# EAGLE board 14275-SparkFun_Ublox SAM-M8Q-Panel (EAGLE 9.1.0), part 1 of 3
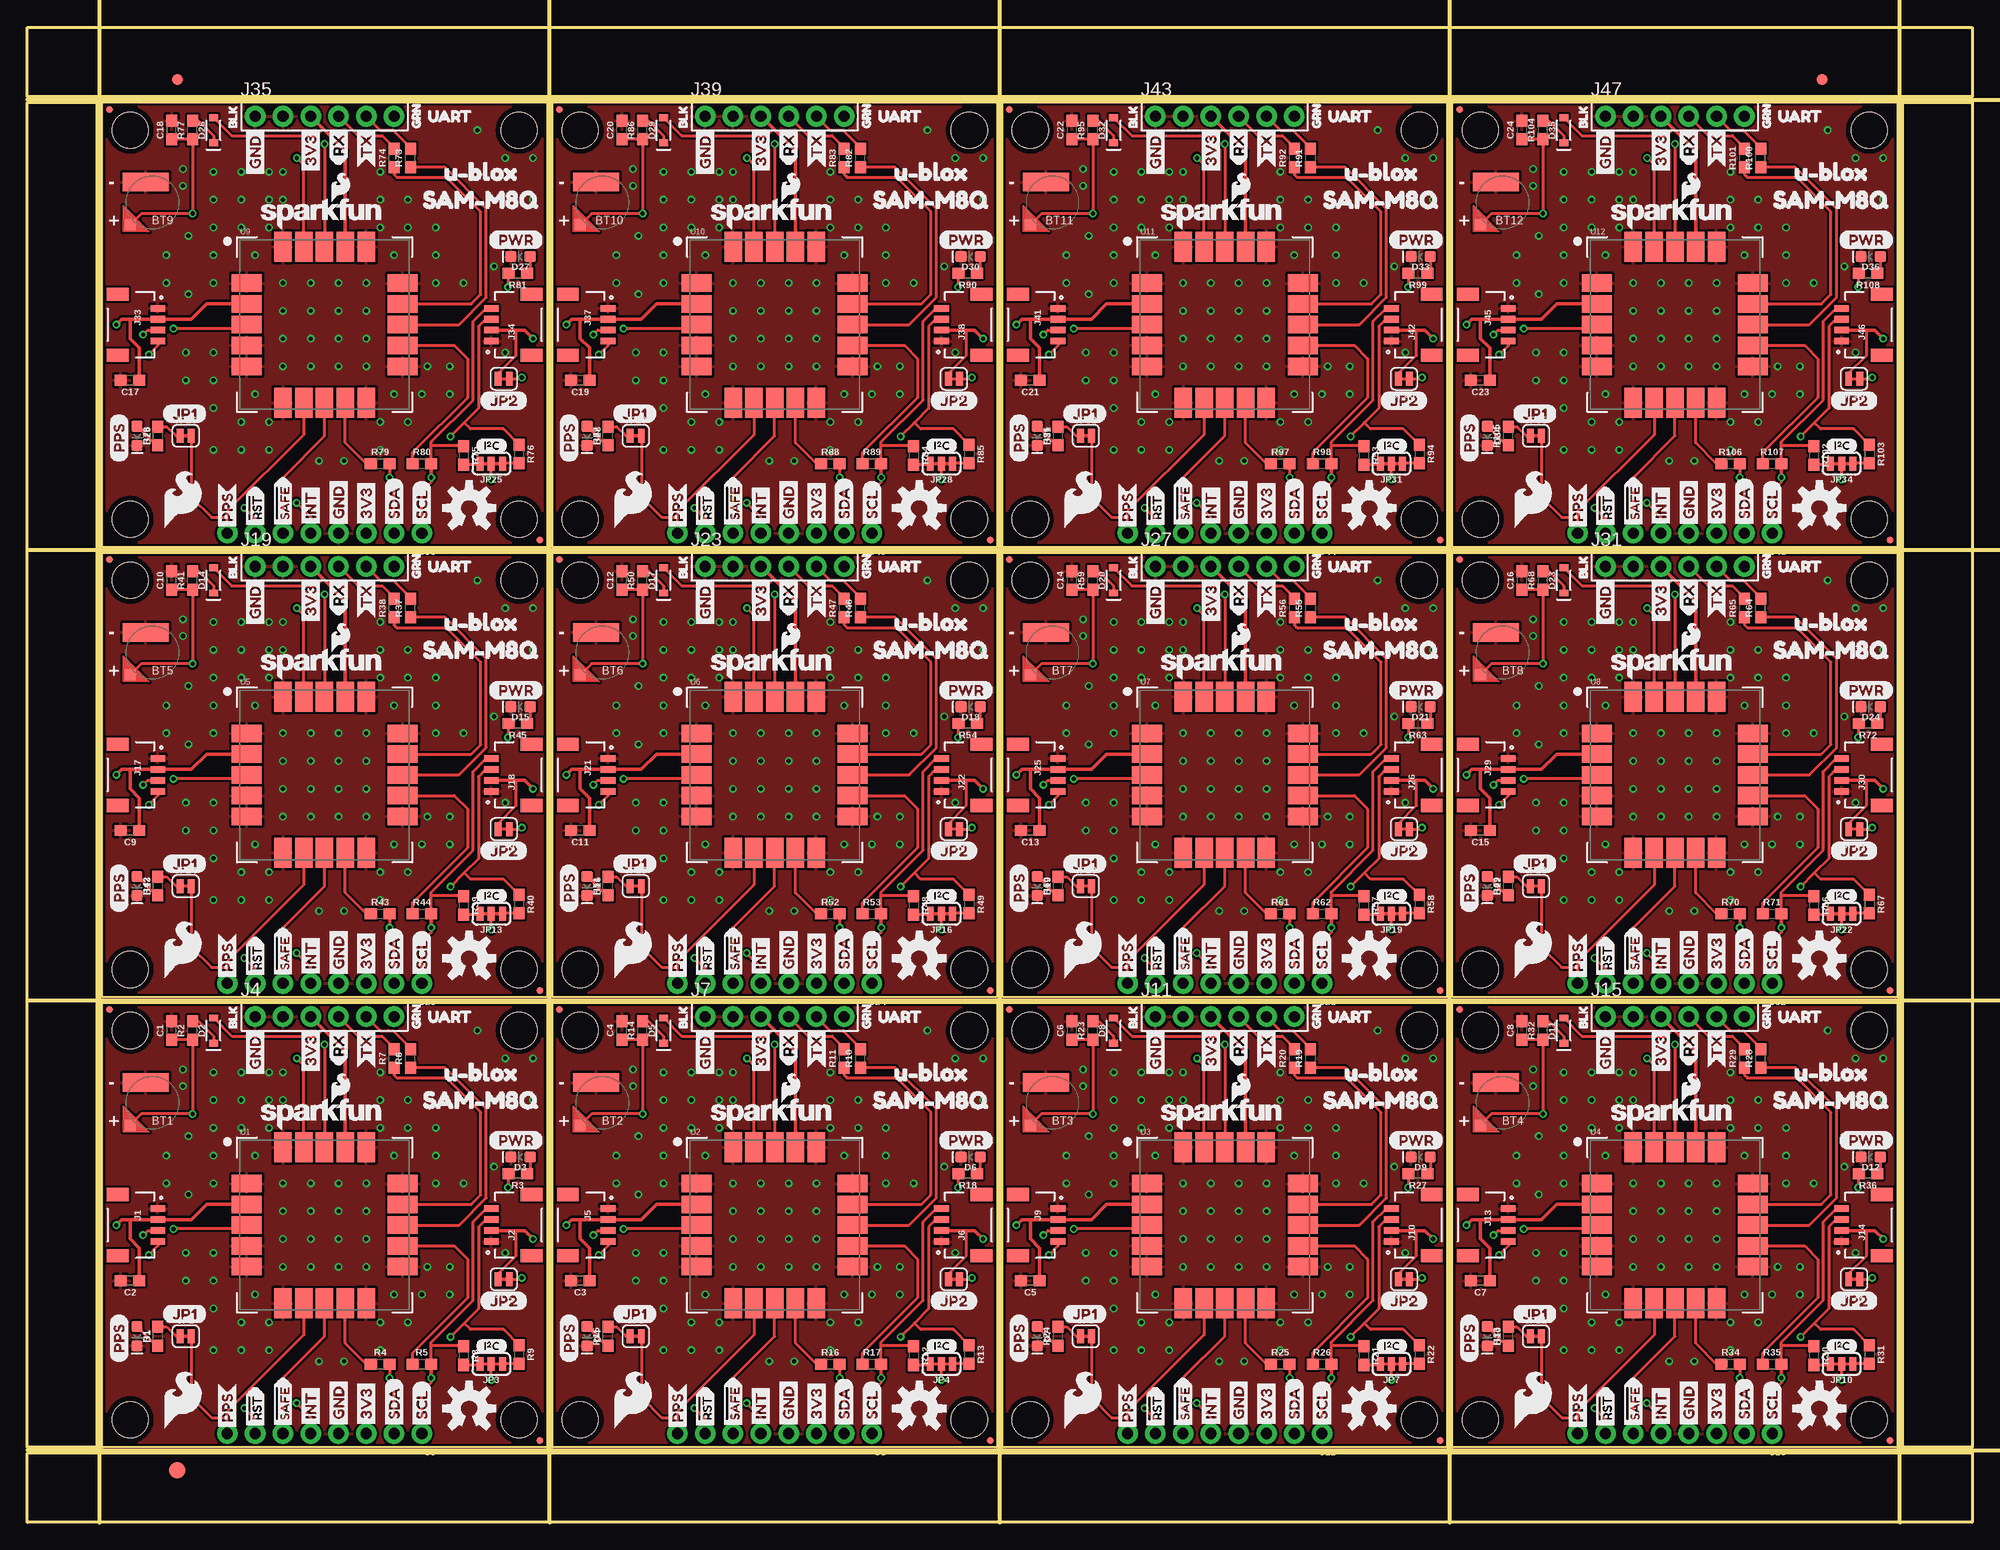
[diagram p0: board, top side]
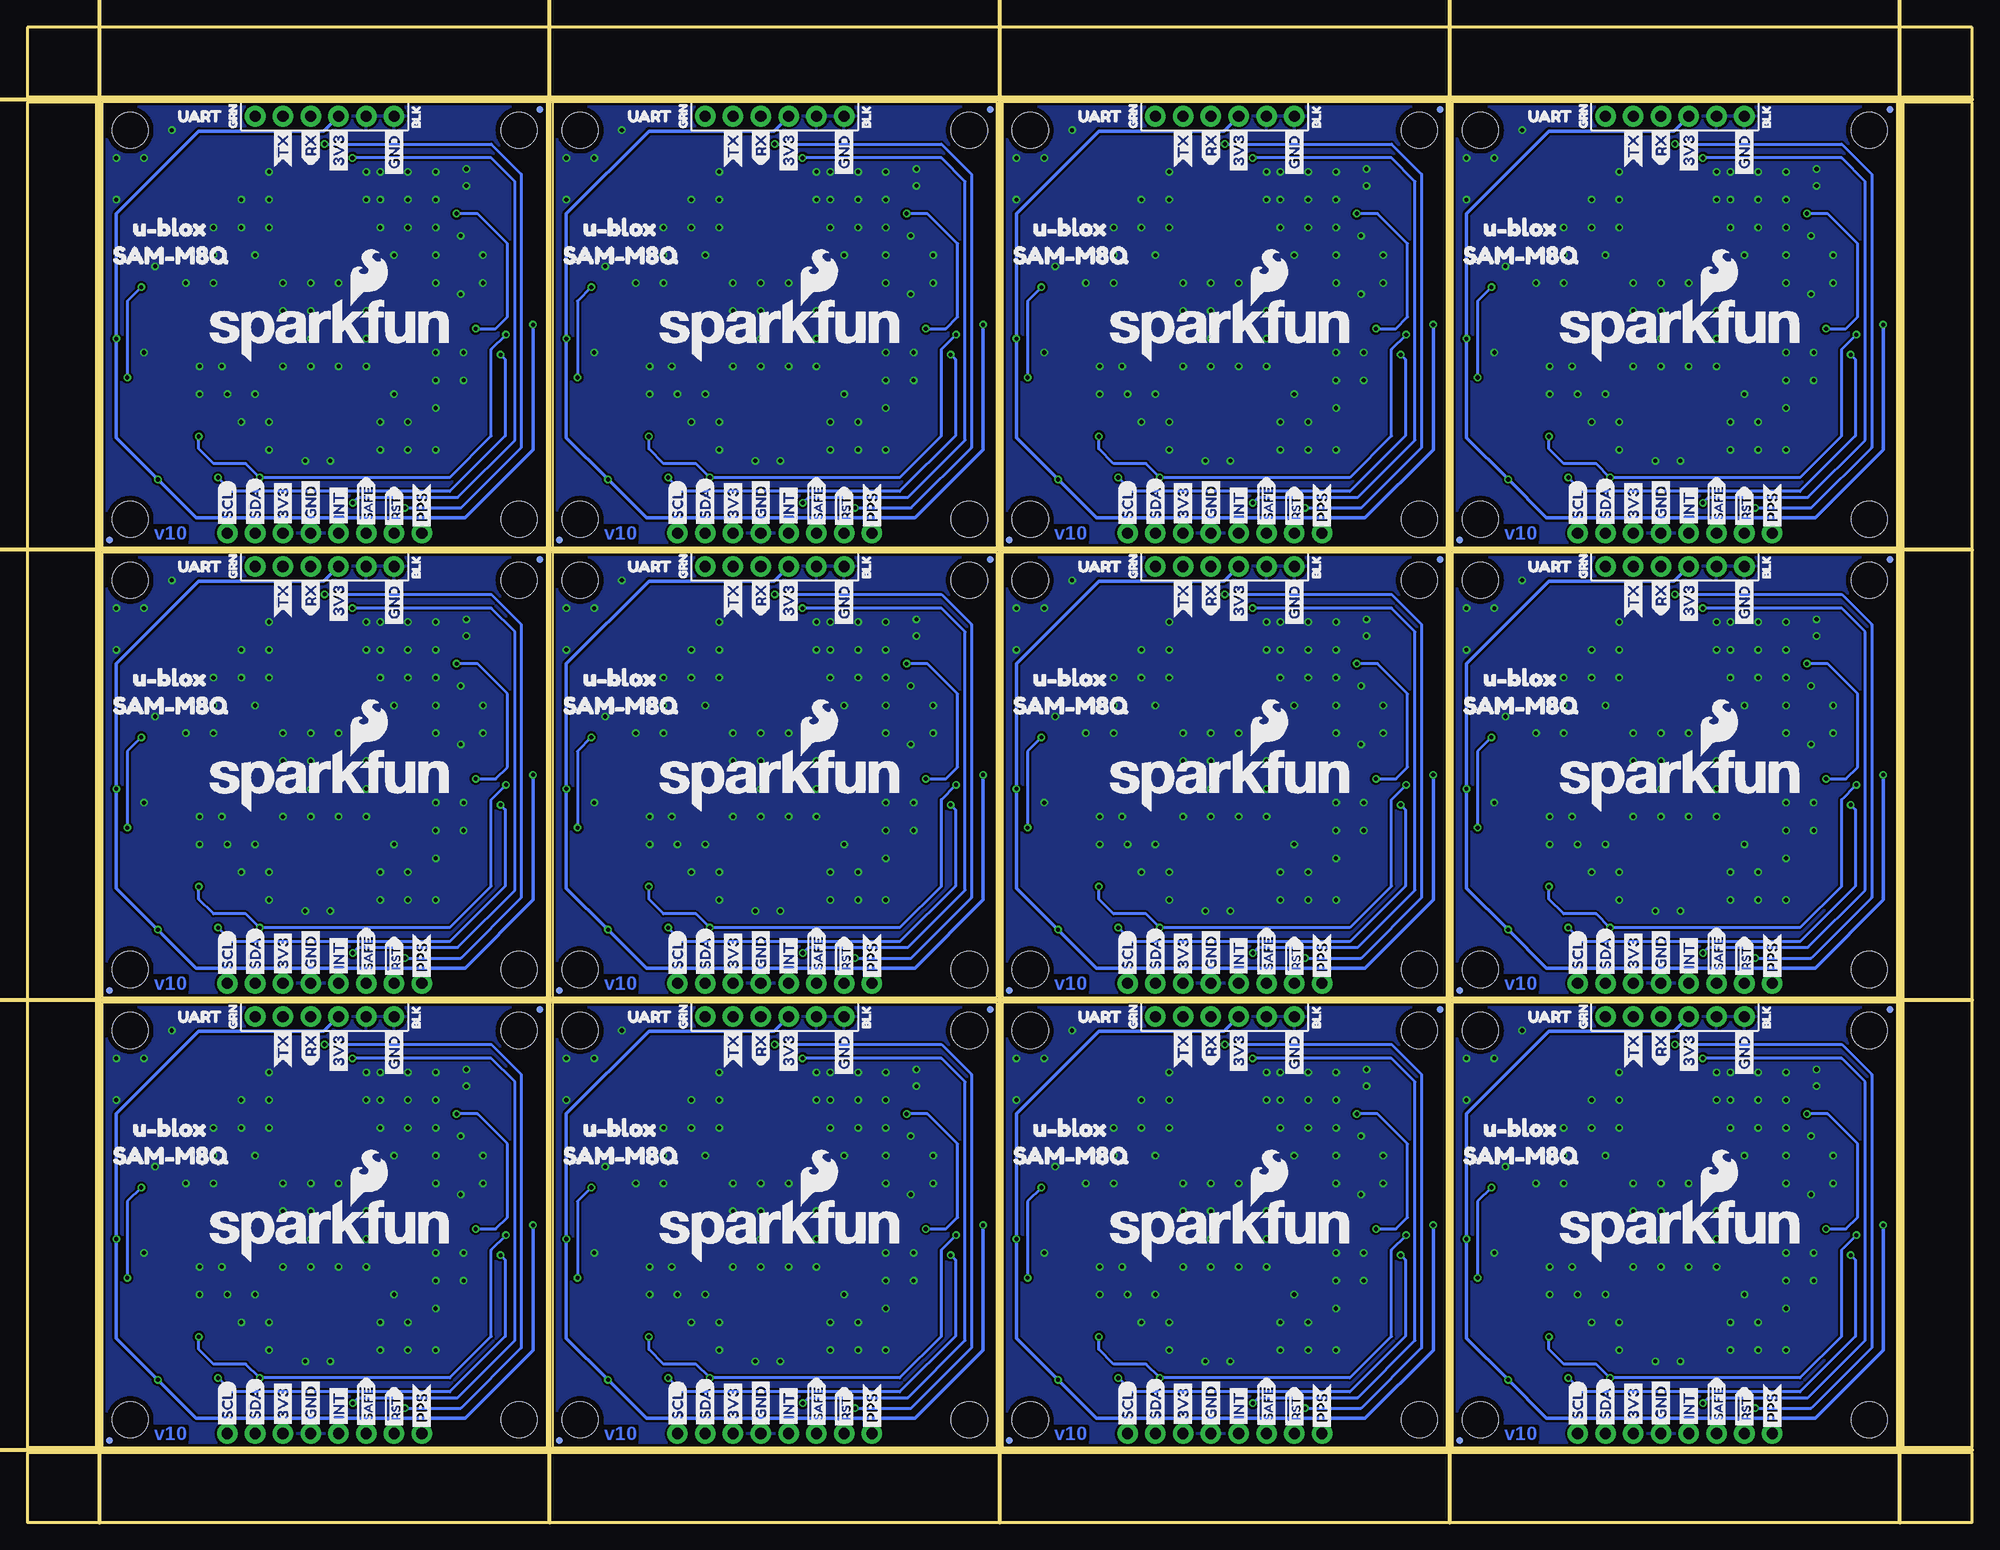
[diagram p1: board, bottom side, seen from below]

Size 177.8 x 136.65 mm. Coordinates in mm from the lower left corner, seen from the top.
Outline: 6.86,6.86 6.86,47.5 47.5,47.5 47.5,6.86 6.86,6.86
Outline: 48.01,6.86 48.01,47.5 88.65,47.5 88.65,6.86 48.01,6.86
Outline: 89.15,6.86 89.15,47.5 129.79,47.5 129.79,6.86 89.15,6.86
Outline: 130.3,6.86 130.3,47.5 170.94,47.5 170.94,6.86 130.3,6.86
Outline: 6.86,48.01 6.86,88.65 47.5,88.65 47.5,48.01 6.86,48.01
Outline: 48.01,48.01 48.01,88.65 88.65,88.65 88.65,48.01 48.01,48.01
Outline: 89.15,48.01 89.15,88.65 129.79,88.65 129.79,48.01 89.15,48.01
Outline: 130.3,48.01 130.3,88.65 170.94,88.65 170.94,48.01 130.3,48.01
Outline: 6.86,89.15 6.86,129.79 47.5,129.79 47.5,89.15 6.86,89.15
Outline: 48.01,89.15 48.01,129.79 88.65,129.79 88.65,89.15 48.01,89.15
Outline: 89.15,89.15 89.15,129.79 129.79,129.79 129.79,89.15 89.15,89.15
Outline: 130.3,89.15 130.3,129.79 170.94,129.79 170.94,89.15 130.3,89.15
Outline: 0,6.35 177.8,6.35 177.8,0 0,0 0,6.35
Outline: 171.45,129.79 177.8,129.79 177.8,6.86 171.45,6.86 171.45,129.79
Outline: 0,136.65 177.8,136.65 177.8,130.3 0,130.3 0,136.65
Outline: 0,129.79 6.35,129.79 6.35,6.86 0,6.86 0,129.79
Copper layers (1*16): Top 0.035mm / dielectric 1.5mm / Bottom 0.035mm
Design rules "SparkFun-2-layer-PCBWay-LIMIT": minimum track width 6mil, minimum drill 0.3mm, track to track 6mil, track to pad 6mil, pad to pad 6mil, via to via 6mil, smd to smd 6mil, copper to edge 6mil, drill to drill 6mil, minimum pad ring 6mil, minimum via ring 6mil, stop-mask expansion 4mil, vias tented up to drill 25mil, thermal gap 10mil
Net classes: 0 default: width 0.254 mm
Milling: 9 lines

## Footprints (pad centres in the part's own frame; a part is rotated, then mirrored left to right if it is on the bottom)
ML414H_IV01E = smd 1 x 1: + 2.022,2.032 | smd 4.2 x 1.7: - 0.6,-1.85
0603 = smd 1.1 x 1: 1 -0.85,0; 2 0.85,0
LED-0603 = smd 1 x 1: A -0.877,0; C 0.877,0
SOD-323 = smd 0.63 x 0.83: A 1.15,0; C -1.15,0
FIDUCIAL-1X2 = smd 1 x 1: 1 0,0
FIDUCIAL-1.5X3 = smd 1.5 x 1.5: 1 0,0
FIDUCIAL-MICRO = smd 0.635 x 0.635: 1 0,0
STAND-OFF = hole 3.302: 0,0
JST04_1MM_RA = smd 0.6 x 1.35: 1 -1.5,0; 2 -0.5,0; 3 0.5,0; 4 1.5,0 | smd 1.2 x 2: NC1 2.8,-3.675; NC2 -2.8,-3.675
1X08_NO_SILK = drill 1.016 pad 1.88: 1 0,0; 2 2.54,0; 3 5.08,0; 4 7.62,0; 5 10.16,0; 6 12.7,0; 7 15.24,0; 8 17.78,0
1X06_NO_SILK = drill 1.016 pad 1.88: 1 0,0; 2 2.54,0; 3 5.08,0; 4 7.62,0; 5 10.16,0; 6 12.7,0
SMT-JUMPER_2_NC_TRACE_SILK = smd 0.635 x 1.27: 1 -0.508,0; 2 0.508,0
SMT-JUMPER_3_2-NC_TRACE_SILK = smd 0.635 x 1.27: 1 -1.016,0; 2 0,0; 3 1.016,0
SAM-M8Q = smd 2.75 x 1.6: 1 -7.125,3.8; 2 -7.125,1.9; 3 -7.125,0; 4 -7.125,-1.9; 5 -7.125,-3.8; 11 7.125,-3.8; 12 7.125,-1.9; 13 7.125,0; 14 7.125,1.9; 15 7.125,3.8 | smd 1.6 x 2.75: 6 -3.8,-7.125; 7 -1.9,-7.125; 8 0,-7.125; 9 1.9,-7.125; 10 3.8,-7.125; 16 3.8,7.125; 17 1.9,7.125; 18 0,7.125; 19 -1.9,7.125; 20 -3.8,7.125

## Placement (x,y rotation side)
BT1  6.8MM_COIN_CELL  [ML414H_IV01E]  11.43,38.35 180 top
BT2  6.8MM_COIN_CELL  [ML414H_IV01E]  52.58,38.35 180 top
BT3  6.8MM_COIN_CELL  [ML414H_IV01E]  93.73,38.35 180 top
BT4  6.8MM_COIN_CELL  [ML414H_IV01E]  134.87,38.35 180 top
BT5  6.8MM_COIN_CELL  [ML414H_IV01E]  11.43,79.5 180 top
BT6  6.8MM_COIN_CELL  [ML414H_IV01E]  52.58,79.5 180 top
BT7  6.8MM_COIN_CELL  [ML414H_IV01E]  93.73,79.5 180 top
BT8  6.8MM_COIN_CELL  [ML414H_IV01E]  134.87,79.5 180 top
BT9  6.8MM_COIN_CELL  [ML414H_IV01E]  11.43,120.65 180 top
BT10  6.8MM_COIN_CELL  [ML414H_IV01E]  52.58,120.65 180 top
BT11  6.8MM_COIN_CELL  [ML414H_IV01E]  93.73,120.65 180 top
BT12  6.8MM_COIN_CELL  [ML414H_IV01E]  134.87,120.65 180 top
C1  1.0uF  [0603]  13.21,44.96 90 top
C2  1.0uF  [0603]  9.4,22.1 180 top
C3  1.0uF  [0603]  50.55,22.1 180 top
C4  1.0uF  [0603]  54.36,44.96 90 top
C5  1.0uF  [0603]  91.69,22.1 180 top
C6  1.0uF  [0603]  95.5,44.96 90 top
C7  1.0uF  [0603]  132.84,22.1 180 top
C8  1.0uF  [0603]  136.65,44.96 90 top
C9  1.0uF  [0603]  9.4,63.25 180 top
C10  1.0uF  [0603]  13.21,86.11 90 top
C11  1.0uF  [0603]  50.55,63.25 180 top
C12  1.0uF  [0603]  54.36,86.11 90 top
C13  1.0uF  [0603]  91.69,63.25 180 top
C14  1.0uF  [0603]  95.5,86.11 90 top
C15  1.0uF  [0603]  132.84,63.25 180 top
C16  1.0uF  [0603]  136.65,86.11 90 top
C17  1.0uF  [0603]  9.4,104.39 180 top
C18  1.0uF  [0603]  13.21,127.25 90 top
C19  1.0uF  [0603]  50.55,104.39 180 top
C20  1.0uF  [0603]  54.36,127.25 90 top
C21  1.0uF  [0603]  91.69,104.39 180 top
C22  1.0uF  [0603]  95.5,127.25 90 top
C23  1.0uF  [0603]  132.84,104.39 180 top
C24  1.0uF  [0603]  136.65,127.25 90 top
D1  Yellow  [LED-0603]  10.03,17.02 270 top
D2  0.5A/40V/420mV  [SOD-323]  17.02,44.96 90 top
D3  RED  [LED-0603]  45.08,33.4 180 top
D4  Yellow  [LED-0603]  51.18,17.02 270 top
D5  0.5A/40V/420mV  [SOD-323]  58.17,44.96 90 top
D6  RED  [LED-0603]  86.23,33.4 180 top
D7  Yellow  [LED-0603]  92.33,17.02 270 top
D8  0.5A/40V/420mV  [SOD-323]  99.31,44.96 90 top
D9  RED  [LED-0603]  127.38,33.4 180 top
D10  Yellow  [LED-0603]  133.48,17.02 270 top
D11  0.5A/40V/420mV  [SOD-323]  140.46,44.96 90 top
D12  RED  [LED-0603]  168.53,33.4 180 top
D13  Yellow  [LED-0603]  10.03,58.17 270 top
D14  0.5A/40V/420mV  [SOD-323]  17.02,86.11 90 top
D15  RED  [LED-0603]  45.08,74.55 180 top
D16  Yellow  [LED-0603]  51.18,58.17 270 top
D17  0.5A/40V/420mV  [SOD-323]  58.17,86.11 90 top
D18  RED  [LED-0603]  86.23,74.55 180 top
D19  Yellow  [LED-0603]  92.33,58.17 270 top
D20  0.5A/40V/420mV  [SOD-323]  99.31,86.11 90 top
D21  RED  [LED-0603]  127.38,74.55 180 top
D22  Yellow  [LED-0603]  133.48,58.17 270 top
D23  0.5A/40V/420mV  [SOD-323]  140.46,86.11 90 top
D24  RED  [LED-0603]  168.53,74.55 180 top
D25  Yellow  [LED-0603]  10.03,99.31 270 top
D26  0.5A/40V/420mV  [SOD-323]  17.02,127.25 90 top
D27  RED  [LED-0603]  45.08,115.7 180 top
D28  Yellow  [LED-0603]  51.18,99.31 270 top
D29  0.5A/40V/420mV  [SOD-323]  58.17,127.25 90 top
D30  RED  [LED-0603]  86.23,115.7 180 top
D31  Yellow  [LED-0603]  92.33,99.31 270 top
D32  0.5A/40V/420mV  [SOD-323]  99.31,127.25 90 top
D33  RED  [LED-0603]  127.38,115.7 180 top
D34  Yellow  [LED-0603]  133.48,99.31 270 top
D35  0.5A/40V/420mV  [SOD-323]  140.46,127.25 90 top
D36  RED  [LED-0603]  168.53,115.7 180 top
E$1  [FIDUCIAL-1X2]  13.72,131.89 0 top
E$2  [FIDUCIAL-1X2]  164.08,131.89 0 top
E$3  [FIDUCIAL-1.5X3]  13.72,4.76 0 top
FD1  FIDUCIALUFIDUCIAL  [FIDUCIAL-MICRO]  46.86,7.49 0 top
FD2  FIDUCIALUFIDUCIAL  [FIDUCIAL-MICRO]  46.86,7.49 0 bottom
FD3  FIDUCIALUFIDUCIAL  [FIDUCIAL-MICRO]  7.49,46.86 0 top
FD4  FIDUCIALUFIDUCIAL  [FIDUCIAL-MICRO]  7.49,46.86 0 bottom
FD5  FIDUCIALUFIDUCIAL  [FIDUCIAL-MICRO]  88.01,7.49 0 top
FD6  FIDUCIALUFIDUCIAL  [FIDUCIAL-MICRO]  48.64,46.86 0 top
FD7  FIDUCIALUFIDUCIAL  [FIDUCIAL-MICRO]  88.01,7.49 0 bottom
FD8  FIDUCIALUFIDUCIAL  [FIDUCIAL-MICRO]  48.64,46.86 0 bottom
FD9  FIDUCIALUFIDUCIAL  [FIDUCIAL-MICRO]  129.16,7.49 0 top
FD10  FIDUCIALUFIDUCIAL  [FIDUCIAL-MICRO]  89.79,46.86 0 top
FD11  FIDUCIALUFIDUCIAL  [FIDUCIAL-MICRO]  129.16,7.49 0 bottom
FD12  FIDUCIALUFIDUCIAL  [FIDUCIAL-MICRO]  89.79,46.86 0 bottom
FD13  FIDUCIALUFIDUCIAL  [FIDUCIAL-MICRO]  170.31,7.49 0 top
FD14  FIDUCIALUFIDUCIAL  [FIDUCIAL-MICRO]  130.94,46.86 0 top
FD15  FIDUCIALUFIDUCIAL  [FIDUCIAL-MICRO]  170.31,7.49 0 bottom
FD16  FIDUCIALUFIDUCIAL  [FIDUCIAL-MICRO]  130.94,46.86 0 bottom
FD17  FIDUCIALUFIDUCIAL  [FIDUCIAL-MICRO]  46.86,48.64 0 top
FD18  FIDUCIALUFIDUCIAL  [FIDUCIAL-MICRO]  7.49,88.01 0 top
FD19  FIDUCIALUFIDUCIAL  [FIDUCIAL-MICRO]  46.86,48.64 0 bottom
FD20  FIDUCIALUFIDUCIAL  [FIDUCIAL-MICRO]  7.49,88.01 0 bottom
FD21  FIDUCIALUFIDUCIAL  [FIDUCIAL-MICRO]  88.01,48.64 0 top
FD22  FIDUCIALUFIDUCIAL  [FIDUCIAL-MICRO]  48.64,88.01 0 top
FD23  FIDUCIALUFIDUCIAL  [FIDUCIAL-MICRO]  88.01,48.64 0 bottom
FD24  FIDUCIALUFIDUCIAL  [FIDUCIAL-MICRO]  48.64,88.01 0 bottom
FD25  FIDUCIALUFIDUCIAL  [FIDUCIAL-MICRO]  129.16,48.64 0 top
FD26  FIDUCIALUFIDUCIAL  [FIDUCIAL-MICRO]  89.79,88.01 0 top
FD27  FIDUCIALUFIDUCIAL  [FIDUCIAL-MICRO]  129.16,48.64 0 bottom
FD28  FIDUCIALUFIDUCIAL  [FIDUCIAL-MICRO]  89.79,88.01 0 bottom
FD29  FIDUCIALUFIDUCIAL  [FIDUCIAL-MICRO]  170.31,48.64 0 top
FD30  FIDUCIALUFIDUCIAL  [FIDUCIAL-MICRO]  130.94,88.01 0 top
FD31  FIDUCIALUFIDUCIAL  [FIDUCIAL-MICRO]  170.31,48.64 0 bottom
FD32  FIDUCIALUFIDUCIAL  [FIDUCIAL-MICRO]  130.94,88.01 0 bottom
FD33  FIDUCIALUFIDUCIAL  [FIDUCIAL-MICRO]  46.86,89.79 0 top
FD34  FIDUCIALUFIDUCIAL  [FIDUCIAL-MICRO]  7.49,129.16 0 top
FD35  FIDUCIALUFIDUCIAL  [FIDUCIAL-MICRO]  46.86,89.79 0 bottom
FD36  FIDUCIALUFIDUCIAL  [FIDUCIAL-MICRO]  7.49,129.16 0 bottom
FD37  FIDUCIALUFIDUCIAL  [FIDUCIAL-MICRO]  88.01,89.79 0 top
FD38  FIDUCIALUFIDUCIAL  [FIDUCIAL-MICRO]  48.64,129.16 0 top
FD39  FIDUCIALUFIDUCIAL  [FIDUCIAL-MICRO]  88.01,89.79 0 bottom
FD40  FIDUCIALUFIDUCIAL  [FIDUCIAL-MICRO]  48.64,129.16 0 bottom
FD41  FIDUCIALUFIDUCIAL  [FIDUCIAL-MICRO]  129.16,89.79 0 top
FD42  FIDUCIALUFIDUCIAL  [FIDUCIAL-MICRO]  89.79,129.16 0 top
FD43  FIDUCIALUFIDUCIAL  [FIDUCIAL-MICRO]  129.16,89.79 0 bottom
FD44  FIDUCIALUFIDUCIAL  [FIDUCIAL-MICRO]  89.79,129.16 0 bottom
FD45  FIDUCIALUFIDUCIAL  [FIDUCIAL-MICRO]  170.31,89.79 0 top
FD46  FIDUCIALUFIDUCIAL  [FIDUCIAL-MICRO]  130.94,129.16 0 top
FD47  FIDUCIALUFIDUCIAL  [FIDUCIAL-MICRO]  170.31,89.79 0 bottom
FD48  FIDUCIALUFIDUCIAL  [FIDUCIAL-MICRO]  130.94,129.16 0 bottom
H1  STAND-OFF  [STAND-OFF]  9.4,9.4 0 top
H2  STAND-OFF  [STAND-OFF]  44.96,9.4 0 top
H3  STAND-OFF  [STAND-OFF]  9.4,44.96 0 top
H4  STAND-OFF  [STAND-OFF]  44.96,44.96 0 top
H5  STAND-OFF  [STAND-OFF]  50.55,44.96 0 top
H6  STAND-OFF  [STAND-OFF]  86.11,44.96 0 top
H7  STAND-OFF  [STAND-OFF]  50.55,9.4 0 top
H8  STAND-OFF  [STAND-OFF]  86.11,9.4 0 top
H9  STAND-OFF  [STAND-OFF]  91.69,44.96 0 top
H10  STAND-OFF  [STAND-OFF]  127.25,44.96 0 top
H11  STAND-OFF  [STAND-OFF]  91.69,9.4 0 top
H12  STAND-OFF  [STAND-OFF]  127.25,9.4 0 top
H13  STAND-OFF  [STAND-OFF]  132.84,44.96 0 top
H14  STAND-OFF  [STAND-OFF]  168.4,44.96 0 top
H15  STAND-OFF  [STAND-OFF]  132.84,9.4 0 top
H16  STAND-OFF  [STAND-OFF]  168.4,9.4 0 top
H17  STAND-OFF  [STAND-OFF]  9.4,86.11 0 top
H18  STAND-OFF  [STAND-OFF]  44.96,86.11 0 top
H19  STAND-OFF  [STAND-OFF]  9.4,50.55 0 top
H20  STAND-OFF  [STAND-OFF]  44.96,50.55 0 top
H21  STAND-OFF  [STAND-OFF]  50.55,86.11 0 top
H22  STAND-OFF  [STAND-OFF]  86.11,86.11 0 top
H23  STAND-OFF  [STAND-OFF]  50.55,50.55 0 top
H24  STAND-OFF  [STAND-OFF]  86.11,50.55 0 top
H25  STAND-OFF  [STAND-OFF]  91.69,86.11 0 top
H26  STAND-OFF  [STAND-OFF]  127.25,86.11 0 top
H27  STAND-OFF  [STAND-OFF]  91.69,50.55 0 top
H28  STAND-OFF  [STAND-OFF]  127.25,50.55 0 top
H29  STAND-OFF  [STAND-OFF]  132.84,86.11 0 top
H30  STAND-OFF  [STAND-OFF]  168.4,86.11 0 top
H31  STAND-OFF  [STAND-OFF]  132.84,50.55 0 top
H32  STAND-OFF  [STAND-OFF]  168.4,50.55 0 top
H33  STAND-OFF  [STAND-OFF]  9.4,127.25 0 top
H34  STAND-OFF  [STAND-OFF]  44.96,127.25 0 top
H35  STAND-OFF  [STAND-OFF]  9.4,91.69 0 top
H36  STAND-OFF  [STAND-OFF]  44.96,91.69 0 top
H37  STAND-OFF  [STAND-OFF]  50.55,127.25 0 top
H38  STAND-OFF  [STAND-OFF]  86.11,127.25 0 top
H39  STAND-OFF  [STAND-OFF]  50.55,91.69 0 top
H40  STAND-OFF  [STAND-OFF]  86.11,91.69 0 top
H41  STAND-OFF  [STAND-OFF]  91.69,127.25 0 top
H42  STAND-OFF  [STAND-OFF]  127.25,127.25 0 top
H43  STAND-OFF  [STAND-OFF]  91.69,91.69 0 top
H44  STAND-OFF  [STAND-OFF]  127.25,91.69 0 top
H45  STAND-OFF  [STAND-OFF]  132.84,127.25 0 top
H46  STAND-OFF  [STAND-OFF]  168.4,127.25 0 top
H47  STAND-OFF  [STAND-OFF]  132.84,91.69 0 top
H48  STAND-OFF  [STAND-OFF]  168.4,91.69 0 top
J1  Qwiic Right Angle  [JST04_1MM_RA]  11.94,27.18 270 top
J2  Qwiic Right Angle  [JST04_1MM_RA]  42.42,27.18 90 top
J3  [1X08_NO_SILK]  36.07,8.13 180 top
J4  BOOT  [1X06_NO_SILK]  20.83,46.23 0 top
J5  Qwiic Right Angle  [JST04_1MM_RA]  53.09,27.18 270 top
J6  Qwiic Right Angle  [JST04_1MM_RA]  83.57,27.18 90 top
J7  BOOT  [1X06_NO_SILK]  61.98,46.23 0 top
J8  [1X08_NO_SILK]  77.22,8.13 180 top
J9  Qwiic Right Angle  [JST04_1MM_RA]  94.23,27.18 270 top
J10  Qwiic Right Angle  [JST04_1MM_RA]  124.71,27.18 90 top
J11  BOOT  [1X06_NO_SILK]  103.12,46.23 0 top
J12  [1X08_NO_SILK]  118.36,8.13 180 top
J13  Qwiic Right Angle  [JST04_1MM_RA]  135.38,27.18 270 top
J14  Qwiic Right Angle  [JST04_1MM_RA]  165.86,27.18 90 top
J15  BOOT  [1X06_NO_SILK]  144.27,46.23 0 top
J16  [1X08_NO_SILK]  159.51,8.13 180 top
J17  Qwiic Right Angle  [JST04_1MM_RA]  11.94,68.33 270 top
J18  Qwiic Right Angle  [JST04_1MM_RA]  42.42,68.33 90 top
J19  BOOT  [1X06_NO_SILK]  20.83,87.38 0 top
J20  [1X08_NO_SILK]  36.07,49.28 180 top
J21  Qwiic Right Angle  [JST04_1MM_RA]  53.09,68.33 270 top
J22  Qwiic Right Angle  [JST04_1MM_RA]  83.57,68.33 90 top
J23  BOOT  [1X06_NO_SILK]  61.98,87.38 0 top
J24  [1X08_NO_SILK]  77.22,49.28 180 top
J25  Qwiic Right Angle  [JST04_1MM_RA]  94.23,68.33 270 top
J26  Qwiic Right Angle  [JST04_1MM_RA]  124.71,68.33 90 top
J27  BOOT  [1X06_NO_SILK]  103.12,87.38 0 top
J28  [1X08_NO_SILK]  118.36,49.28 180 top
J29  Qwiic Right Angle  [JST04_1MM_RA]  135.38,68.33 270 top
J30  Qwiic Right Angle  [JST04_1MM_RA]  165.86,68.33 90 top
J31  BOOT  [1X06_NO_SILK]  144.27,87.38 0 top
J32  [1X08_NO_SILK]  159.51,49.28 180 top
J33  Qwiic Right Angle  [JST04_1MM_RA]  11.94,109.47 270 top
J34  Qwiic Right Angle  [JST04_1MM_RA]  42.42,109.47 90 top
J35  BOOT  [1X06_NO_SILK]  20.83,128.52 0 top
J36  [1X08_NO_SILK]  36.07,90.42 180 top
J37  Qwiic Right Angle  [JST04_1MM_RA]  53.09,109.47 270 top
J38  Qwiic Right Angle  [JST04_1MM_RA]  83.57,109.47 90 top
J39  BOOT  [1X06_NO_SILK]  61.98,128.52 0 top
J40  [1X08_NO_SILK]  77.22,90.42 180 top
J41  Qwiic Right Angle  [JST04_1MM_RA]  94.23,109.47 270 top
J42  Qwiic Right Angle  [JST04_1MM_RA]  124.71,109.47 90 top
J43  BOOT  [1X06_NO_SILK]  103.12,128.52 0 top
J44  [1X08_NO_SILK]  118.36,90.42 180 top
J45  Qwiic Right Angle  [JST04_1MM_RA]  135.38,109.47 270 top
J46  Qwiic Right Angle  [JST04_1MM_RA]  165.86,109.47 90 top
J47  BOOT  [1X06_NO_SILK]  144.27,128.52 0 top
J48  [1X08_NO_SILK]  159.51,90.42 180 top
JP1  [SMT-JUMPER_2_NC_TRACE_SILK]  14.48,17.02 0 top
JP2  JUMPER-SMT_2_NC_TRACE_SILK  [SMT-JUMPER_2_NC_TRACE_SILK]  43.56,22.23 180 top
JP3  JUMPER-SMT_3_2-NC_TRACE_SILK  [SMT-JUMPER_3_2-NC_TRACE_SILK]  42.42,14.48 180 top
JP4  JUMPER-SMT_3_2-NC_TRACE_SILK  [SMT-JUMPER_3_2-NC_TRACE_SILK]  83.57,14.48 180 top
JP5  [SMT-JUMPER_2_NC_TRACE_SILK]  55.63,17.02 0 top
JP6  JUMPER-SMT_2_NC_TRACE_SILK  [SMT-JUMPER_2_NC_TRACE_SILK]  84.71,22.23 180 top
JP7  JUMPER-SMT_3_2-NC_TRACE_SILK  [SMT-JUMPER_3_2-NC_TRACE_SILK]  124.71,14.48 180 top
JP8  [SMT-JUMPER_2_NC_TRACE_SILK]  96.77,17.02 0 top
JP9  JUMPER-SMT_2_NC_TRACE_SILK  [SMT-JUMPER_2_NC_TRACE_SILK]  125.86,22.23 180 top
JP10  JUMPER-SMT_3_2-NC_TRACE_SILK  [SMT-JUMPER_3_2-NC_TRACE_SILK]  165.86,14.48 180 top
JP11  [SMT-JUMPER_2_NC_TRACE_SILK]  137.92,17.02 0 top
JP12  JUMPER-SMT_2_NC_TRACE_SILK  [SMT-JUMPER_2_NC_TRACE_SILK]  167,22.23 180 top
JP13  JUMPER-SMT_3_2-NC_TRACE_SILK  [SMT-JUMPER_3_2-NC_TRACE_SILK]  42.42,55.63 180 top
JP14  [SMT-JUMPER_2_NC_TRACE_SILK]  14.48,58.17 0 top
JP15  JUMPER-SMT_2_NC_TRACE_SILK  [SMT-JUMPER_2_NC_TRACE_SILK]  43.56,63.37 180 top
JP16  JUMPER-SMT_3_2-NC_TRACE_SILK  [SMT-JUMPER_3_2-NC_TRACE_SILK]  83.57,55.63 180 top
JP17  [SMT-JUMPER_2_NC_TRACE_SILK]  55.63,58.17 0 top
JP18  JUMPER-SMT_2_NC_TRACE_SILK  [SMT-JUMPER_2_NC_TRACE_SILK]  84.71,63.37 180 top
JP19  JUMPER-SMT_3_2-NC_TRACE_SILK  [SMT-JUMPER_3_2-NC_TRACE_SILK]  124.71,55.63 180 top
JP20  [SMT-JUMPER_2_NC_TRACE_SILK]  96.77,58.17 0 top
JP21  JUMPER-SMT_2_NC_TRACE_SILK  [SMT-JUMPER_2_NC_TRACE_SILK]  125.86,63.37 180 top
JP22  JUMPER-SMT_3_2-NC_TRACE_SILK  [SMT-JUMPER_3_2-NC_TRACE_SILK]  165.86,55.63 180 top
JP23  [SMT-JUMPER_2_NC_TRACE_SILK]  137.92,58.17 0 top
JP24  JUMPER-SMT_2_NC_TRACE_SILK  [SMT-JUMPER_2_NC_TRACE_SILK]  167,63.37 180 top
JP25  JUMPER-SMT_3_2-NC_TRACE_SILK  [SMT-JUMPER_3_2-NC_TRACE_SILK]  42.42,96.77 180 top
JP26  [SMT-JUMPER_2_NC_TRACE_SILK]  14.48,99.31 0 top
JP27  JUMPER-SMT_2_NC_TRACE_SILK  [SMT-JUMPER_2_NC_TRACE_SILK]  43.56,104.52 180 top
JP28  JUMPER-SMT_3_2-NC_TRACE_SILK  [SMT-JUMPER_3_2-NC_TRACE_SILK]  83.57,96.77 180 top
JP29  [SMT-JUMPER_2_NC_TRACE_SILK]  55.63,99.31 0 top
JP30  JUMPER-SMT_2_NC_TRACE_SILK  [SMT-JUMPER_2_NC_TRACE_SILK]  84.71,104.52 180 top
JP31  JUMPER-SMT_3_2-NC_TRACE_SILK  [SMT-JUMPER_3_2-NC_TRACE_SILK]  124.71,96.77 180 top
JP32  [SMT-JUMPER_2_NC_TRACE_SILK]  96.77,99.31 0 top
JP33  JUMPER-SMT_2_NC_TRACE_SILK  [SMT-JUMPER_2_NC_TRACE_SILK]  125.86,104.52 180 top
JP34  JUMPER-SMT_3_2-NC_TRACE_SILK  [SMT-JUMPER_3_2-NC_TRACE_SILK]  165.86,96.77 180 top
JP35  [SMT-JUMPER_2_NC_TRACE_SILK]  137.92,99.31 0 top
JP36  JUMPER-SMT_2_NC_TRACE_SILK  [SMT-JUMPER_2_NC_TRACE_SILK]  167,104.52 180 top
LOGO1  SFE_LOGO_NAME_FLAME.2_INCH  [SFE_LOGO_NAME_FLAME_.2]  26.67,26.67 0 bottom
LOGO2  OSHW-LOGOM  [OSHW-LOGO-M]  40.39,10.41 0 top
LOGO3  OSHW-LOGOM  [OSHW-LOGO-M]  81.53,10.41 0 top
LOGO4  SFE_LOGO_NAME_FLAME.2_INCH  [SFE_LOGO_NAME_FLAME_.2]  67.82,26.67 0 bottom
LOGO5  OSHW-LOGOM  [OSHW-LOGO-M]  122.68,10.41 0 top
LOGO6  SFE_LOGO_NAME_FLAME.2_INCH  [SFE_LOGO_NAME_FLAME_.2]  108.97,26.67 0 bottom
LOGO7  OSHW-LOGOM  [OSHW-LOGO-M]  163.83,10.41 0 top
LOGO8  SFE_LOGO_NAME_FLAME.2_INCH  [SFE_LOGO_NAME_FLAME_.2]  150.11,26.67 0 bottom
LOGO9  OSHW-LOGOM  [OSHW-LOGO-M]  40.39,51.56 0 top
LOGO10  SFE_LOGO_NAME_FLAME.2_INCH  [SFE_LOGO_NAME_FLAME_.2]  26.67,67.82 0 bottom
LOGO11  OSHW-LOGOM  [OSHW-LOGO-M]  81.53,51.56 0 top
LOGO12  SFE_LOGO_NAME_FLAME.2_INCH  [SFE_LOGO_NAME_FLAME_.2]  67.82,67.82 0 bottom
LOGO13  OSHW-LOGOM  [OSHW-LOGO-M]  122.68,51.56 0 top
LOGO14  SFE_LOGO_NAME_FLAME.2_INCH  [SFE_LOGO_NAME_FLAME_.2]  108.97,67.82 0 bottom
LOGO15  OSHW-LOGOM  [OSHW-LOGO-M]  163.83,51.56 0 top
LOGO16  SFE_LOGO_NAME_FLAME.2_INCH  [SFE_LOGO_NAME_FLAME_.2]  150.11,67.82 0 bottom
LOGO17  OSHW-LOGOM  [OSHW-LOGO-M]  40.39,92.71 0 top
LOGO18  SFE_LOGO_NAME_FLAME.2_INCH  [SFE_LOGO_NAME_FLAME_.2]  26.67,108.97 0 bottom
LOGO19  OSHW-LOGOM  [OSHW-LOGO-M]  81.53,92.71 0 top
LOGO20  SFE_LOGO_NAME_FLAME.2_INCH  [SFE_LOGO_NAME_FLAME_.2]  67.82,108.97 0 bottom
LOGO21  OSHW-LOGOM  [OSHW-LOGO-M]  122.68,92.71 0 top
LOGO22  SFE_LOGO_NAME_FLAME.2_INCH  [SFE_LOGO_NAME_FLAME_.2]  108.97,108.97 0 bottom
LOGO23  OSHW-LOGOM  [OSHW-LOGO-M]  163.83,92.71 0 top
LOGO24  SFE_LOGO_NAME_FLAME.2_INCH  [SFE_LOGO_NAME_FLAME_.2]  150.11,108.97 0 bottom
R1  1k  [0603]  11.94,17.02 90 top
R2  3.3k  [0603]  15.11,44.96 90 top
R3  1k  [0603]  44.83,31.88 180 top
R4  22  [0603]  32.26,14.48 0 top
R5  22  [0603]  36.07,14.48 0 top
R6  470  [0603]  35.03,42.42 90 top
R7  470  [0603]  33.53,42.42 90 top
R8  2.2k  [0603]  39.88,15.24 270 top
R9  2.2k  [0603]  44.96,15.37 270 top
R10  470  [0603]  76.17,42.42 90 top
R11  470  [0603]  74.68,42.42 90 top
R12  2.2k  [0603]  81.03,15.24 270 top
R13  2.2k  [0603]  86.11,15.37 270 top
R14  3.3k  [0603]  56.26,44.96 90 top
R15  1k  [0603]  53.09,17.02 90 top
R16  22  [0603]  73.41,14.48 0 top
R17  22  [0603]  77.22,14.48 0 top
R18  1k  [0603]  85.98,31.88 180 top
R19  470  [0603]  117.32,42.42 90 top
R20  470  [0603]  115.82,42.42 90 top
R21  2.2k  [0603]  122.17,15.24 270 top
R22  2.2k  [0603]  127.25,15.37 270 top
R23  3.3k  [0603]  97.41,44.96 90 top
R24  1k  [0603]  94.23,17.02 90 top
R25  22  [0603]  114.55,14.48 0 top
R26  22  [0603]  118.36,14.48 0 top
R27  1k  [0603]  127.13,31.88 180 top
R28  470  [0603]  158.47,42.42 90 top
R29  470  [0603]  156.97,42.42 90 top
R30  2.2k  [0603]  163.32,15.24 270 top
R31  2.2k  [0603]  168.4,15.37 270 top
R32  3.3k  [0603]  138.56,44.96 90 top
R33  1k  [0603]  135.38,17.02 90 top
R34  22  [0603]  155.7,14.48 0 top
R35  22  [0603]  159.51,14.48 0 top
R36  1k  [0603]  168.28,31.88 180 top
R37  470  [0603]  35.03,83.57 90 top
R38  470  [0603]  33.53,83.57 90 top
R39  2.2k  [0603]  39.88,56.39 270 top
R40  2.2k  [0603]  44.96,56.51 270 top
R41  3.3k  [0603]  15.11,86.11 90 top
R42  1k  [0603]  11.94,58.17 90 top
R43  22  [0603]  32.26,55.63 0 top
R44  22  [0603]  36.07,55.63 0 top
R45  1k  [0603]  44.83,73.03 180 top
R46  470  [0603]  76.17,83.57 90 top
R47  470  [0603]  74.68,83.57 90 top
R48  2.2k  [0603]  81.03,56.39 270 top
R49  2.2k  [0603]  86.11,56.51 270 top
R50  3.3k  [0603]  56.26,86.11 90 top
R51  1k  [0603]  53.09,58.17 90 top
R52  22  [0603]  73.41,55.63 0 top
R53  22  [0603]  77.22,55.63 0 top
R54  1k  [0603]  85.98,73.03 180 top
R55  470  [0603]  117.32,83.57 90 top
R56  470  [0603]  115.82,83.57 90 top
R57  2.2k  [0603]  122.17,56.39 270 top
R58  2.2k  [0603]  127.25,56.51 270 top
R59  3.3k  [0603]  97.41,86.11 90 top
R60  1k  [0603]  94.23,58.17 90 top
R61  22  [0603]  114.55,55.63 0 top
R62  22  [0603]  118.36,55.63 0 top
R63  1k  [0603]  127.13,73.03 180 top
R64  470  [0603]  158.47,83.57 90 top
R65  470  [0603]  156.97,83.57 90 top
R66  2.2k  [0603]  163.32,56.39 270 top
R67  2.2k  [0603]  168.4,56.51 270 top
R68  3.3k  [0603]  138.56,86.11 90 top
R69  1k  [0603]  135.38,58.17 90 top
R70  22  [0603]  155.7,55.63 0 top
R71  22  [0603]  159.51,55.63 0 top
R72  1k  [0603]  168.28,73.03 180 top
R73  470  [0603]  35.03,124.71 90 top
R74  470  [0603]  33.53,124.71 90 top
R75  2.2k  [0603]  39.88,97.54 270 top
R76  2.2k  [0603]  44.96,97.66 270 top
R77  3.3k  [0603]  15.11,127.25 90 top
R78  1k  [0603]  11.94,99.31 90 top
R79  22  [0603]  32.26,96.77 0 top
R80  22  [0603]  36.07,96.77 0 top
R81  1k  [0603]  44.83,114.17 180 top
R82  470  [0603]  76.17,124.71 90 top
R83  470  [0603]  74.68,124.71 90 top
R84  2.2k  [0603]  81.03,97.54 270 top
R85  2.2k  [0603]  86.11,97.66 270 top
R86  3.3k  [0603]  56.26,127.25 90 top
R87  1k  [0603]  53.09,99.31 90 top
R88  22  [0603]  73.41,96.77 0 top
R89  22  [0603]  77.22,96.77 0 top
R90  1k  [0603]  85.98,114.17 180 top
R91  470  [0603]  117.32,124.71 90 top
R92  470  [0603]  115.82,124.71 90 top
R93  2.2k  [0603]  122.17,97.54 270 top
R94  2.2k  [0603]  127.25,97.66 270 top
R95  3.3k  [0603]  97.41,127.25 90 top
R96  1k  [0603]  94.23,99.31 90 top
R97  22  [0603]  114.55,96.77 0 top
R98  22  [0603]  118.36,96.77 0 top
R99  1k  [0603]  127.13,114.17 180 top
R100  470  [0603]  158.47,124.71 90 top
R101  470  [0603]  156.97,124.71 90 top
R102  2.2k  [0603]  163.32,97.54 270 top
R103  2.2k  [0603]  168.4,97.66 270 top
R104  3.3k  [0603]  138.56,127.25 90 top
R105  1k  [0603]  135.38,99.31 90 top
R106  22  [0603]  155.7,96.77 0 top
R107  22  [0603]  159.51,96.77 0 top
R108  1k  [0603]  168.28,114.17 180 top
U1  UBLOX_SAM_M8Q-0-10  [SAM-M8Q]  27.18,27.18 0 top
U2  UBLOX_SAM_M8Q-0-10  [SAM-M8Q]  68.33,27.18 0 top
U3  UBLOX_SAM_M8Q-0-10  [SAM-M8Q]  109.47,27.18 0 top
U4  UBLOX_SAM_M8Q-0-10  [SAM-M8Q]  150.62,27.18 0 top
U5  UBLOX_SAM_M8Q-0-10  [SAM-M8Q]  27.18,68.33 0 top
U6  UBLOX_SAM_M8Q-0-10  [SAM-M8Q]  68.33,68.33 0 top
U7  UBLOX_SAM_M8Q-0-10  [SAM-M8Q]  109.47,68.33 0 top
U8  UBLOX_SAM_M8Q-0-10  [SAM-M8Q]  150.62,68.33 0 top
U9  UBLOX_SAM_M8Q-0-10  [SAM-M8Q]  27.18,109.47 0 top
U10  UBLOX_SAM_M8Q-0-10  [SAM-M8Q]  68.33,109.47 0 top
U11  UBLOX_SAM_M8Q-0-10  [SAM-M8Q]  109.47,109.47 0 top
U12  UBLOX_SAM_M8Q-0-10  [SAM-M8Q]  150.62,109.47 0 top
U$1  [SDA-[)]  33.53,8.51 90 top
U$2  [SFE_LOGO_FLAME_.2]  14.22,11.18 0 top
U$3  [SCL-[)]  36.07,8.51 90 top
U$4  [SDA-[)]  33.53,8.51 90 bottom
U$5  [SCL-[)]  36.07,8.51 90 bottom
U$6  [3V3-04]  30.99,8.51 90 top
U$7  [3V3-04]  30.99,8.51 90 bottom
U$8  [GND-04]  28.45,8.51 90 top
U$9  [GND-04]  28.45,8.51 90 bottom
U$10  [I_SUPER2_C-()-03]  41.02,16.13 0 top
U$11  [UART0]  41.53,46.23 0 bottom
U$12  [BLK1]  18.8,44.45 90 top
U$13  [BLK1]  18.8,44.45 90 bottom
U$14  [GRN2]  35.56,44.45 90 top
U$15  [INT8]  25.91,8.51 90 top
U$16  [INT8]  25.91,8.51 90 bottom
U$17  [GRN2]  35.56,44.45 90 bottom
U$18  [JP10]  12.32,19.05 0 top
U$19  [RX6]  28.45,41.66 90 top
U$20  [RX6]  28.45,41.66 90 bottom
U$21  [SAM#M8Q4]  34.8,38.61 0 top
U$22  [U#BLOX3]  46.1,36.07 0 bottom
U$23  [TX7]  30.99,41.53 90 top
U$24  [TX7]  30.99,41.53 90 bottom
U$25  [SAM#M8Q4]  47.88,33.53 0 bottom
U$26  [U#BLOX3]  36.7,41.15 0 top
U$27  [3V3-04]  25.91,40.77 90 top
U$28  [SFE_LOGO_NAME_FLAME_.1]  26.92,37.34 0 top
U$29  [PPS0]  8.38,14.61 90 top
U$30  [PWR0]  42.16,34.92 0 top
U$31  [JP20]  41.38,20.24 0 top
U$32  [3V3-04]  25.91,40.77 90 bottom
U$33  [GND-04]  20.83,40.51 90 top
U$34  [GND-04]  20.83,40.51 90 bottom
U$35  [#RST3]  20.83,8.25 90 top
U$36  [#RST3]  20.83,8.25 90 bottom
U$37  [SDA-[)]  74.68,8.51 90 top
U$38  [SCL-[)]  77.22,8.51 90 top
U$39  [#SAFE1]  23.37,8.25 90 top
U$40  [#SAFE1]  23.37,8.25 90 bottom
U$41  [SDA-[)]  74.68,8.51 90 bottom
U$42  [SCL-[)]  77.22,8.51 90 bottom
U$43  [PPS5]  18.29,8.25 90 top
U$44  [PPS5]  18.29,8.25 90 bottom
U$45  [UART0]  35.69,46.23 0 top
U$46  [3V3-04]  72.14,8.51 90 top
U$47  [3V3-04]  72.14,8.51 90 bottom
U$48  [GND-04]  69.6,8.51 90 top
U$49  [GND-04]  69.6,8.51 90 bottom
U$50  [I_SUPER2_C-()-03]  82.17,16.13 0 top
U$51  [INT8]  67.06,8.51 90 top
U$52  [INT8]  67.06,8.51 90 bottom
U$53  [RX6]  69.6,41.66 90 top
U$54  [RX6]  69.6,41.66 90 bottom
U$55  [SAM#M8Q4]  75.95,38.61 0 top
U$56  [TX7]  72.14,41.53 90 top
U$57  [TX7]  72.14,41.53 90 bottom
U$58  [U#BLOX3]  77.85,41.15 0 top
U$59  [U#BLOX3]  87.25,36.07 0 bottom
U$60  [SAM#M8Q4]  89.03,33.53 0 bottom
U$61  [PPS0]  49.53,14.61 90 top
U$62  [3V3-04]  67.06,40.77 90 top
U$63  [3V3-04]  67.06,40.77 90 bottom
U$64  [GND-04]  61.98,40.51 90 top
U$65  [GND-04]  61.98,40.51 90 bottom
U$66  [#RST3]  61.98,8.25 90 top
U$67  [#RST3]  61.98,8.25 90 bottom
U$68  [#SAFE1]  64.52,8.25 90 top
U$69  [#SAFE1]  64.52,8.25 90 bottom
U$70  [PPS5]  59.44,8.25 90 top
U$71  [PPS5]  59.44,8.25 90 bottom
U$72  [UART0]  76.84,46.23 0 top
U$73  [UART0]  82.68,46.23 0 bottom
U$74  [BLK1]  59.94,44.45 90 top
U$75  [BLK1]  59.94,44.45 90 bottom
U$76  [GRN2]  76.71,44.45 90 top
U$77  [GRN2]  76.71,44.45 90 bottom
U$78  [JP10]  53.47,19.05 0 top
U$79  [PWR0]  83.31,34.92 0 top
U$80  [SFE_LOGO_FLAME_.2]  55.37,11.18 0 top
U$81  [JP20]  82.52,20.24 0 top
U$82  [SFE_LOGO_NAME_FLAME_.1]  68.07,37.34 0 top
U$83  [SDA-[)]  115.82,8.51 90 top
U$84  [SCL-[)]  118.36,8.51 90 top
U$85  [SDA-[)]  115.82,8.51 90 bottom
U$86  [SCL-[)]  118.36,8.51 90 bottom
U$87  [3V3-04]  113.28,8.51 90 top
U$88  [3V3-04]  113.28,8.51 90 bottom
U$89  [GND-04]  110.74,8.51 90 top
U$90  [GND-04]  110.74,8.51 90 bottom
U$91  [I_SUPER2_C-()-03]  123.32,16.13 0 top
U$92  [INT8]  108.2,8.51 90 top
U$93  [INT8]  108.2,8.51 90 bottom
U$94  [RX6]  110.74,41.66 90 top
U$95  [RX6]  110.74,41.66 90 bottom
U$96  [SAM#M8Q4]  117.09,38.61 0 top
U$97  [TX7]  113.28,41.53 90 top
U$98  [TX7]  113.28,41.53 90 bottom
U$99  [U#BLOX3]  119,41.15 0 top
U$100  [U#BLOX3]  128.4,36.07 0 bottom
U$101  [SAM#M8Q4]  130.17,33.53 0 bottom
U$102  [PPS0]  90.68,14.61 90 top
U$103  [3V3-04]  108.2,40.77 90 top
U$104  [3V3-04]  108.2,40.77 90 bottom
U$105  [GND-04]  103.12,40.51 90 top
U$106  [GND-04]  103.12,40.51 90 bottom
U$107  [#RST3]  103.12,8.25 90 top
U$108  [#RST3]  103.12,8.25 90 bottom
U$109  [#SAFE1]  105.66,8.25 90 top
U$110  [#SAFE1]  105.66,8.25 90 bottom
U$111  [PPS5]  100.58,8.25 90 top
U$112  [PPS5]  100.58,8.25 90 bottom
U$113  [UART0]  117.98,46.23 0 top
U$114  [UART0]  123.83,46.23 0 bottom
U$115  [BLK1]  101.09,44.45 90 top
U$116  [BLK1]  101.09,44.45 90 bottom
U$117  [GRN2]  117.86,44.45 90 top
U$118  [GRN2]  117.86,44.45 90 bottom
U$119  [JP10]  94.62,19.05 0 top
U$120  [PWR0]  124.46,34.92 0 top
U$121  [SFE_LOGO_FLAME_.2]  96.52,11.18 0 top
U$122  [JP20]  123.67,20.24 0 top
U$123  [SFE_LOGO_NAME_FLAME_.1]  109.22,37.34 0 top
U$124  [SDA-[)]  156.97,8.51 90 top
U$125  [SCL-[)]  159.51,8.51 90 top
U$126  [SDA-[)]  156.97,8.51 90 bottom
U$127  [SCL-[)]  159.51,8.51 90 bottom
U$128  [3V3-04]  154.43,8.51 90 top
U$129  [3V3-04]  154.43,8.51 90 bottom
U$130  [GND-04]  151.89,8.51 90 top
U$131  [GND-04]  151.89,8.51 90 bottom
U$132  [I_SUPER2_C-()-03]  164.47,16.13 0 top
U$133  [INT8]  149.35,8.51 90 top
U$134  [INT8]  149.35,8.51 90 bottom
U$135  [RX6]  151.89,41.66 90 top
U$136  [RX6]  151.89,41.66 90 bottom
U$137  [SAM#M8Q4]  158.24,38.61 0 top
U$138  [TX7]  154.43,41.53 90 top
U$139  [TX7]  154.43,41.53 90 bottom
U$140  [U#BLOX3]  160.15,41.15 0 top
U$141  [U#BLOX3]  169.55,36.07 0 bottom
U$142  [SAM#M8Q4]  171.32,33.53 0 bottom
U$143  [PPS0]  131.83,14.61 90 top
U$144  [3V3-04]  149.35,40.77 90 top
U$145  [3V3-04]  149.35,40.77 90 bottom
U$146  [GND-04]  144.27,40.51 90 top
U$147  [GND-04]  144.27,40.51 90 bottom
U$148  [#RST3]  144.27,8.25 90 top
U$149  [#RST3]  144.27,8.25 90 bottom
U$150  [#SAFE1]  146.81,8.25 90 top
U$151  [#SAFE1]  146.81,8.25 90 bottom
U$152  [PPS5]  141.73,8.25 90 top
U$153  [PPS5]  141.73,8.25 90 bottom
U$154  [UART0]  159.13,46.23 0 top
U$155  [UART0]  164.97,46.23 0 bottom
U$156  [BLK1]  142.24,44.45 90 top
U$157  [BLK1]  142.24,44.45 90 bottom
U$158  [GRN2]  159,44.45 90 top
U$159  [GRN2]  159,44.45 90 bottom
U$160  [JP10]  135.76,19.05 0 top
U$161  [PWR0]  165.61,34.92 0 top
U$162  [SFE_LOGO_FLAME_.2]  137.67,11.18 0 top
U$163  [JP20]  164.82,20.24 0 top
U$164  [SFE_LOGO_NAME_FLAME_.1]  150.37,37.34 0 top
U$165  [SDA-[)]  33.53,49.66 90 top
U$166  [SCL-[)]  36.07,49.66 90 top
U$167  [SDA-[)]  33.53,49.66 90 bottom
U$168  [SCL-[)]  36.07,49.66 90 bottom
U$169  [3V3-04]  30.99,49.66 90 top
U$170  [3V3-04]  30.99,49.66 90 bottom
U$171  [GND-04]  28.45,49.66 90 top
U$172  [GND-04]  28.45,49.66 90 bottom
U$173  [I_SUPER2_C-()-03]  41.02,57.28 0 top
U$174  [INT8]  25.91,49.66 90 top
U$175  [INT8]  25.91,49.66 90 bottom
U$176  [RX6]  28.45,82.8 90 top
U$177  [RX6]  28.45,82.8 90 bottom
U$178  [SAM#M8Q4]  34.8,79.76 0 top
U$179  [TX7]  30.99,82.68 90 top
U$180  [TX7]  30.99,82.68 90 bottom
U$181  [U#BLOX3]  36.7,82.3 0 top
U$182  [U#BLOX3]  46.1,77.22 0 bottom
U$183  [SAM#M8Q4]  47.88,74.68 0 bottom
U$184  [PPS0]  8.38,55.75 90 top
U$185  [3V3-04]  25.91,81.92 90 top
U$186  [3V3-04]  25.91,81.92 90 bottom
U$187  [GND-04]  20.83,81.66 90 top
U$188  [GND-04]  20.83,81.66 90 bottom
U$189  [#RST3]  20.83,49.4 90 top
U$190  [#RST3]  20.83,49.4 90 bottom
U$191  [#SAFE1]  23.37,49.4 90 top
U$192  [#SAFE1]  23.37,49.4 90 bottom
U$193  [PPS5]  18.29,49.4 90 top
U$194  [PPS5]  18.29,49.4 90 bottom
U$195  [UART0]  35.69,87.38 0 top
U$196  [UART0]  41.53,87.38 0 bottom
U$197  [BLK1]  18.8,85.6 90 top
U$198  [BLK1]  18.8,85.6 90 bottom
U$199  [GRN2]  35.56,85.6 90 top
U$200  [GRN2]  35.56,85.6 90 bottom
U$201  [JP10]  12.32,60.2 0 top
U$202  [PWR0]  42.16,76.07 0 top
U$203  [SFE_LOGO_FLAME_.2]  14.22,52.32 0 top
U$204  [JP20]  41.38,61.39 0 top
U$205  [SFE_LOGO_NAME_FLAME_.1]  26.92,78.49 0 top
U$206  [SDA-[)]  74.68,49.66 90 top
U$207  [SCL-[)]  77.22,49.66 90 top
U$208  [SDA-[)]  74.68,49.66 90 bottom
U$209  [SCL-[)]  77.22,49.66 90 bottom
U$210  [3V3-04]  72.14,49.66 90 top
U$211  [3V3-04]  72.14,49.66 90 bottom
U$212  [GND-04]  69.6,49.66 90 top
U$213  [GND-04]  69.6,49.66 90 bottom
U$214  [I_SUPER2_C-()-03]  82.17,57.28 0 top
U$215  [INT8]  67.06,49.66 90 top
U$216  [INT8]  67.06,49.66 90 bottom
U$217  [RX6]  69.6,82.8 90 top
U$218  [RX6]  69.6,82.8 90 bottom
U$219  [SAM#M8Q4]  75.95,79.76 0 top
U$220  [TX7]  72.14,82.68 90 top
U$221  [TX7]  72.14,82.68 90 bottom
U$222  [U#BLOX3]  77.85,82.3 0 top
U$223  [U#BLOX3]  87.25,77.22 0 bottom
U$224  [SAM#M8Q4]  89.03,74.68 0 bottom
U$225  [PPS0]  49.53,55.75 90 top
U$226  [3V3-04]  67.06,81.92 90 top
U$227  [3V3-04]  67.06,81.92 90 bottom
U$228  [GND-04]  61.98,81.66 90 top
U$229  [GND-04]  61.98,81.66 90 bottom
U$230  [#RST3]  61.98,49.4 90 top
U$231  [#RST3]  61.98,49.4 90 bottom
U$232  [#SAFE1]  64.52,49.4 90 top
U$233  [#SAFE1]  64.52,49.4 90 bottom
U$234  [PPS5]  59.44,49.4 90 top
U$235  [PPS5]  59.44,49.4 90 bottom
U$236  [UART0]  76.84,87.38 0 top
U$237  [UART0]  82.68,87.38 0 bottom
U$238  [BLK1]  59.94,85.6 90 top
U$239  [BLK1]  59.94,85.6 90 bottom
U$240  [GRN2]  76.71,85.6 90 top
U$241  [GRN2]  76.71,85.6 90 bottom
U$242  [JP10]  53.47,60.2 0 top
U$243  [PWR0]  83.31,76.07 0 top
U$244  [SFE_LOGO_FLAME_.2]  55.37,52.32 0 top
U$245  [JP20]  82.52,61.39 0 top
U$246  [SFE_LOGO_NAME_FLAME_.1]  68.07,78.49 0 top
U$247  [SDA-[)]  115.82,49.66 90 top
U$248  [SCL-[)]  118.36,49.66 90 top
U$249  [SDA-[)]  115.82,49.66 90 bottom
U$250  [SCL-[)]  118.36,49.66 90 bottom
U$251  [3V3-04]  113.28,49.66 90 top
U$252  [3V3-04]  113.28,49.66 90 bottom
U$253  [GND-04]  110.74,49.66 90 top
U$254  [GND-04]  110.74,49.66 90 bottom
U$255  [I_SUPER2_C-()-03]  123.32,57.28 0 top
U$256  [INT8]  108.2,49.66 90 top
U$257  [INT8]  108.2,49.66 90 bottom
U$258  [RX6]  110.74,82.8 90 top
U$259  [RX6]  110.74,82.8 90 bottom
U$260  [SAM#M8Q4]  117.09,79.76 0 top
U$261  [TX7]  113.28,82.68 90 top
U$262  [TX7]  113.28,82.68 90 bottom
U$263  [U#BLOX3]  119,82.3 0 top
U$264  [U#BLOX3]  128.4,77.22 0 bottom
U$265  [SAM#M8Q4]  130.17,74.68 0 bottom
U$266  [PPS0]  90.68,55.75 90 top
U$267  [3V3-04]  108.2,81.92 90 top
U$268  [3V3-04]  108.2,81.92 90 bottom
U$269  [GND-04]  103.12,81.66 90 top
U$270  [GND-04]  103.12,81.66 90 bottom
U$271  [#RST3]  103.12,49.4 90 top
U$272  [#RST3]  103.12,49.4 90 bottom
U$273  [#SAFE1]  105.66,49.4 90 top
U$274  [#SAFE1]  105.66,49.4 90 bottom
U$275  [PPS5]  100.58,49.4 90 top
U$276  [PPS5]  100.58,49.4 90 bottom
U$277  [UART0]  117.98,87.38 0 top
U$278  [UART0]  123.83,87.38 0 bottom
U$279  [BLK1]  101.09,85.6 90 top
U$280  [BLK1]  101.09,85.6 90 bottom
U$281  [GRN2]  117.86,85.6 90 top
U$282  [GRN2]  117.86,85.6 90 bottom
U$283  [JP10]  94.62,60.2 0 top
U$284  [PWR0]  124.46,76.07 0 top
U$285  [SFE_LOGO_FLAME_.2]  96.52,52.32 0 top
U$286  [JP20]  123.67,61.39 0 top
U$287  [SFE_LOGO_NAME_FLAME_.1]  109.22,78.49 0 top
U$288  [SDA-[)]  156.97,49.66 90 top
U$289  [SCL-[)]  159.51,49.66 90 top
U$290  [SDA-[)]  156.97,49.66 90 bottom
U$291  [SCL-[)]  159.51,49.66 90 bottom
U$292  [3V3-04]  154.43,49.66 90 top
U$293  [3V3-04]  154.43,49.66 90 bottom
U$294  [GND-04]  151.89,49.66 90 top
U$295  [GND-04]  151.89,49.66 90 bottom
U$296  [I_SUPER2_C-()-03]  164.47,57.28 0 top
U$297  [INT8]  149.35,49.66 90 top
U$298  [INT8]  149.35,49.66 90 bottom
U$299  [RX6]  151.89,82.8 90 top
U$300  [RX6]  151.89,82.8 90 bottom
U$301  [SAM#M8Q4]  158.24,79.76 0 top
U$302  [TX7]  154.43,82.68 90 top
U$303  [TX7]  154.43,82.68 90 bottom
U$304  [U#BLOX3]  160.15,82.3 0 top
U$305  [U#BLOX3]  169.55,77.22 0 bottom
U$306  [SAM#M8Q4]  171.32,74.68 0 bottom
U$307  [PPS0]  131.83,55.75 90 top
U$308  [3V3-04]  149.35,81.92 90 top
U$309  [3V3-04]  149.35,81.92 90 bottom
U$310  [GND-04]  144.27,81.66 90 top
U$311  [GND-04]  144.27,81.66 90 bottom
U$312  [#RST3]  144.27,49.4 90 top
U$313  [#RST3]  144.27,49.4 90 bottom
U$314  [#SAFE1]  146.81,49.4 90 top
U$315  [#SAFE1]  146.81,49.4 90 bottom
U$316  [PPS5]  141.73,49.4 90 top
U$317  [PPS5]  141.73,49.4 90 bottom
U$318  [UART0]  159.13,87.38 0 top
U$319  [UART0]  164.97,87.38 0 bottom
U$320  [BLK1]  142.24,85.6 90 top
U$321  [BLK1]  142.24,85.6 90 bottom
U$322  [GRN2]  159,85.6 90 top
U$323  [GRN2]  159,85.6 90 bottom
U$324  [JP10]  135.76,60.2 0 top
U$325  [PWR0]  165.61,76.07 0 top
U$326  [SFE_LOGO_FLAME_.2]  137.67,52.32 0 top
U$327  [JP20]  164.82,61.39 0 top
U$328  [SFE_LOGO_NAME_FLAME_.1]  150.37,78.49 0 top
U$329  [SDA-[)]  33.53,90.81 90 top
U$330  [SCL-[)]  36.07,90.81 90 top
U$331  [SDA-[)]  33.53,90.81 90 bottom
U$332  [SCL-[)]  36.07,90.81 90 bottom
U$333  [3V3-04]  30.99,90.81 90 top
U$334  [3V3-04]  30.99,90.81 90 bottom
U$335  [GND-04]  28.45,90.81 90 top
U$336  [GND-04]  28.45,90.81 90 bottom
U$337  [I_SUPER2_C-()-03]  41.02,98.42 0 top
U$338  [INT8]  25.91,90.81 90 top
U$339  [INT8]  25.91,90.81 90 bottom
U$340  [RX6]  28.45,123.95 90 top
U$341  [RX6]  28.45,123.95 90 bottom
U$342  [SAM#M8Q4]  34.8,120.9 0 top
U$343  [TX7]  30.99,123.83 90 top
U$344  [TX7]  30.99,123.83 90 bottom
U$345  [U#BLOX3]  36.7,123.44 0 top
U$346  [U#BLOX3]  46.1,118.36 0 bottom
U$347  [SAM#M8Q4]  47.88,115.82 0 bottom
U$348  [PPS0]  8.38,96.9 90 top
U$349  [3V3-04]  25.91,123.06 90 top
U$350  [3V3-04]  25.91,123.06 90 bottom
U$351  [GND-04]  20.83,122.81 90 top
U$352  [GND-04]  20.83,122.81 90 bottom
U$353  [#RST3]  20.83,90.55 90 top
U$354  [#RST3]  20.83,90.55 90 bottom
U$355  [#SAFE1]  23.37,90.55 90 top
U$356  [#SAFE1]  23.37,90.55 90 bottom
U$357  [PPS5]  18.29,90.55 90 top
U$358  [PPS5]  18.29,90.55 90 bottom
U$359  [UART0]  35.69,128.52 0 top
U$360  [UART0]  41.53,128.52 0 bottom
U$361  [BLK1]  18.8,126.75 90 top
U$362  [BLK1]  18.8,126.75 90 bottom
U$363  [GRN2]  35.56,126.75 90 top
U$364  [GRN2]  35.56,126.75 90 bottom
U$365  [JP10]  12.32,101.35 0 top
U$366  [PWR0]  42.16,117.22 0 top
U$367  [SFE_LOGO_FLAME_.2]  14.22,93.47 0 top
U$368  [JP20]  41.38,102.54 0 top
U$369  [SFE_LOGO_NAME_FLAME_.1]  26.92,119.63 0 top
U$370  [SDA-[)]  74.68,90.81 90 top
U$371  [SCL-[)]  77.22,90.81 90 top
U$372  [SDA-[)]  74.68,90.81 90 bottom
U$373  [SCL-[)]  77.22,90.81 90 bottom
U$374  [3V3-04]  72.14,90.81 90 top
U$375  [3V3-04]  72.14,90.81 90 bottom
U$376  [GND-04]  69.6,90.81 90 top
U$377  [GND-04]  69.6,90.81 90 bottom
U$378  [I_SUPER2_C-()-03]  82.17,98.42 0 top
U$379  [INT8]  67.06,90.81 90 top
U$380  [INT8]  67.06,90.81 90 bottom
U$381  [RX6]  69.6,123.95 90 top
U$382  [RX6]  69.6,123.95 90 bottom
U$383  [SAM#M8Q4]  75.95,120.9 0 top
U$384  [TX7]  72.14,123.83 90 top
U$385  [TX7]  72.14,123.83 90 bottom
U$386  [U#BLOX3]  77.85,123.44 0 top
U$387  [U#BLOX3]  87.25,118.36 0 bottom
U$388  [SAM#M8Q4]  89.03,115.82 0 bottom
U$389  [PPS0]  49.53,96.9 90 top
U$390  [3V3-04]  67.06,123.06 90 top
U$391  [3V3-04]  67.06,123.06 90 bottom
U$392  [GND-04]  61.98,122.81 90 top
U$393  [GND-04]  61.98,122.81 90 bottom
U$394  [#RST3]  61.98,90.55 90 top
U$395  [#RST3]  61.98,90.55 90 bottom
U$396  [#SAFE1]  64.52,90.55 90 top
U$397  [#SAFE1]  64.52,90.55 90 bottom
U$398  [PPS5]  59.44,90.55 90 top
U$399  [PPS5]  59.44,90.55 90 bottom
U$400  [UART0]  76.84,128.52 0 top
U$401  [UART0]  82.68,128.52 0 bottom
U$402  [BLK1]  59.94,126.75 90 top
U$403  [BLK1]  59.94,126.75 90 bottom
U$404  [GRN2]  76.71,126.75 90 top
U$405  [GRN2]  76.71,126.75 90 bottom
U$406  [JP10]  53.47,101.35 0 top
U$407  [PWR0]  83.31,117.22 0 top
U$408  [SFE_LOGO_FLAME_.2]  55.37,93.47 0 top
U$409  [JP20]  82.52,102.54 0 top
U$410  [SFE_LOGO_NAME_FLAME_.1]  68.07,119.63 0 top
U$411  [SDA-[)]  115.82,90.81 90 top
U$412  [SCL-[)]  118.36,90.81 90 top
U$413  [SDA-[)]  115.82,90.81 90 bottom
U$414  [SCL-[)]  118.36,90.81 90 bottom
U$415  [3V3-04]  113.28,90.81 90 top
U$416  [3V3-04]  113.28,90.81 90 bottom
U$417  [GND-04]  110.74,90.81 90 top
U$418  [GND-04]  110.74,90.81 90 bottom
U$419  [I_SUPER2_C-()-03]  123.32,98.42 0 top
U$420  [INT8]  108.2,90.81 90 top
U$421  [INT8]  108.2,90.81 90 bottom
U$422  [RX6]  110.74,123.95 90 top
U$423  [RX6]  110.74,123.95 90 bottom
U$424  [SAM#M8Q4]  117.09,120.9 0 top
U$425  [TX7]  113.28,123.83 90 top
U$426  [TX7]  113.28,123.83 90 bottom
U$427  [U#BLOX3]  119,123.44 0 top
U$428  [U#BLOX3]  128.4,118.36 0 bottom
U$429  [SAM#M8Q4]  130.17,115.82 0 bottom
U$430  [PPS0]  90.68,96.9 90 top
U$431  [3V3-04]  108.2,123.06 90 top
U$432  [3V3-04]  108.2,123.06 90 bottom
U$433  [GND-04]  103.12,122.81 90 top
U$434  [GND-04]  103.12,122.81 90 bottom
U$435  [#RST3]  103.12,90.55 90 top
U$436  [#RST3]  103.12,90.55 90 bottom
U$437  [#SAFE1]  105.66,90.55 90 top
U$438  [#SAFE1]  105.66,90.55 90 bottom
U$439  [PPS5]  100.58,90.55 90 top
U$440  [PPS5]  100.58,90.55 90 bottom
U$441  [UART0]  117.98,128.52 0 top
U$442  [UART0]  123.83,128.52 0 bottom
U$443  [BLK1]  101.09,126.75 90 top
U$444  [BLK1]  101.09,126.75 90 bottom
U$445  [GRN2]  117.86,126.75 90 top
U$446  [GRN2]  117.86,126.75 90 bottom
U$447  [JP10]  94.62,101.35 0 top
U$448  [PWR0]  124.46,117.22 0 top
U$449  [SFE_LOGO_FLAME_.2]  96.52,93.47 0 top
U$450  [JP20]  123.67,102.54 0 top
U$451  [SFE_LOGO_NAME_FLAME_.1]  109.22,119.63 0 top
U$452  [SDA-[)]  156.97,90.81 90 top
U$453  [SCL-[)]  159.51,90.81 90 top
U$454  [SDA-[)]  156.97,90.81 90 bottom
U$455  [SCL-[)]  159.51,90.81 90 bottom
U$456  [3V3-04]  154.43,90.81 90 top
U$457  [3V3-04]  154.43,90.81 90 bottom
U$458  [GND-04]  151.89,90.81 90 top
U$459  [GND-04]  151.89,90.81 90 bottom
U$460  [I_SUPER2_C-()-03]  164.47,98.42 0 top
U$461  [INT8]  149.35,90.81 90 top
U$462  [INT8]  149.35,90.81 90 bottom
U$463  [RX6]  151.89,123.95 90 top
U$464  [RX6]  151.89,123.95 90 bottom
U$465  [SAM#M8Q4]  158.24,120.9 0 top
U$466  [TX7]  154.43,123.83 90 top
U$467  [TX7]  154.43,123.83 90 bottom
U$468  [U#BLOX3]  160.15,123.44 0 top
U$469  [U#BLOX3]  169.55,118.36 0 bottom
U$470  [SAM#M8Q4]  171.32,115.82 0 bottom
U$471  [PPS0]  131.83,96.9 90 top
U$472  [3V3-04]  149.35,123.06 90 top
U$473  [3V3-04]  149.35,123.06 90 bottom
U$474  [GND-04]  144.27,122.81 90 top
U$475  [GND-04]  144.27,122.81 90 bottom
U$476  [#RST3]  144.27,90.55 90 top
U$477  [#RST3]  144.27,90.55 90 bottom
U$478  [#SAFE1]  146.81,90.55 90 top
U$479  [#SAFE1]  146.81,90.55 90 bottom
U$480  [PPS5]  141.73,90.55 90 top
U$481  [PPS5]  141.73,90.55 90 bottom
U$482  [UART0]  159.13,128.52 0 top
U$483  [UART0]  164.97,128.52 0 bottom
U$484  [BLK1]  142.24,126.75 90 top
U$485  [BLK1]  142.24,126.75 90 bottom
U$486  [GRN2]  159,126.75 90 top
U$487  [GRN2]  159,126.75 90 bottom
U$488  [JP10]  135.76,101.35 0 top
U$489  [PWR0]  165.61,117.22 0 top
U$490  [SFE_LOGO_FLAME_.2]  137.67,93.47 0 top
U$491  [JP20]  164.82,102.54 0 top
U$492  [SFE_LOGO_NAME_FLAME_.1]  150.37,119.63 0 top

## Library data of the parts
BT1-BT12 = SparkFun-Batteries; PROD_ID: BATT-14267
C1-C24 = SparkFun-Capacitors; PROD_ID: CAP-00868
D1 D4 D7 D10 D13 D16 D19 D22 D25 D28 D31 D34 = SparkFun-LED; PROD_ID: DIO-09003
D2 D5 D8 D11 D14 D17 D20 D23 D26 D29 D32 D35 = SparkFun-DiscreteSemi; PROD_ID: DIO-10955
D3 D6 D9 D12 D15 D18 D21 D24 D27 D30 D33 D36 = SparkFun-LED; PROD_ID: DIO-00819
E$1 E$2 FD1-FD48 LOGO1-LOGO24 U$2 U$28 U$80 U$82 U$121 U$123 U$162 U$164 U$203 U$205 U$244 U$246 U$285 U$287 U$326 U$328 U$367 U$369 U$408 U$410 U$449 U$451 U$490 U$492 = SparkFun-Aesthetics
E$3 = SparkFun-Retired
H1-H48 = SparkFun-Hardware
J1 J2 J5 J6 J9 J10 J13 J14 J17 J18 J21 J22 J25 J26 J29 J30 J33 J34 J37 J38 J41 J42 J45 J46 = SparkFun-Connectors; PROD_ID: CONN-13694
J3 J8 J12 J16 J20 J24 J28 J32 J36 J40 J44 J48 = SparkFun-Connectors; PROD_ID: CONN-08438
J4 J7 J11 J15 J19 J23 J27 J31 J35 J39 J43 J47 = SparkFun-Connectors
JP1-JP36 = SparkFun-Jumpers
R1 R3 R15 R18 R24 R27 R33 R36 R42 R45 R51 R54 R60 R63 R69 R72 R78 R81 R87 R90 R96 R99 R105 R108 = SparkFun-Resistors; PROD_ID: RES-07856
R2 R14 R23 R32 R41 R50 R59 R68 R77 R86 R95 R104 = SparkFun-Resistors; PROD_ID: RES-07851
R4 R5 R16 R17 R25 R26 R34 R35 R43 R44 R52 R53 R61 R62 R70 R71 R79 R80 R88 R89 R97 R98 R106 R107 = SparkFun-Resistors; PROD_ID: RES-08698
R6 R7 R10 R11 R19 R20 R28 R29 R37 R38 R46 R47 R55 R56 R64 R65 R73 R74 R82 R83 R91 R92 R100 R101 = SparkFun-Resistors; PROD_ID: RES-07869
R8 R9 R12 R13 R21 R22 R30 R31 R39 R40 R48 R49 R57 R58 R66 R67 R75 R76 R84 R85 R93 R94 R102 R103 = SparkFun-Resistors; PROD_ID: RES-08272
U1-U12 = SparkFun-GPS; PROD_ID: IC-14070
U$1 U$3-U$10 U$27 U$32-U$34 U$37 U$38 U$41 U$42 U$46-U$50 U$62-U$65 U$83-U$91 U$103-U$106 U$124-U$132 U$144-U$147 U$165-U$173 U$185-U$188 U$206-U$214 U$226-U$229 U$247-U$255 U$267-U$270 U$288-U$296 U$308-U$311 U$329-U$337 U$349-U$352 U$370-U$378 U$390-U$393 U$411-U$419 U$431-U$434 U$452-U$460 U$472-U$475 = Labels
U$11 U$35 U$36 U$39 U$40 U$43-U$45 U$66-U$73 U$107-U$114 U$148-U$155 U$189-U$196 U$230-U$237 U$271-U$278 U$312-U$319 U$353-U$360 U$394-U$401 U$435-U$442 U$476-U$483 = buzzard_labels (7)
U$12-U$14 U$17 U$18 U$74-U$78 U$115-U$119 U$156-U$160 U$197-U$201 U$238-U$242 U$279-U$283 U$320-U$324 U$361-U$365 U$402-U$406 U$443-U$447 U$484-U$488 = buzzard_labels (8)
U$15 U$16 U$19-U$26 U$51-U$60 U$92-U$101 U$133-U$142 U$174-U$183 U$215-U$224 U$256-U$265 U$297-U$306 U$338-U$347 U$379-U$388 U$420-U$429 U$461-U$470 = buzzard_labels (5)
U$29 U$61 U$102 U$143 U$184 U$225 U$266 U$307 U$348 U$389 U$430 U$471 = buzzard_labels (6)
U$30 U$79 U$120 U$161 U$202 U$243 U$284 U$325 U$366 U$407 U$448 U$489 = PWR
U$31 U$81 U$122 U$163 U$204 U$245 U$286 U$327 U$368 U$409 U$450 U$491 = JP2